# EAGLE board safebox_prototype (EAGLE 9.6.2)
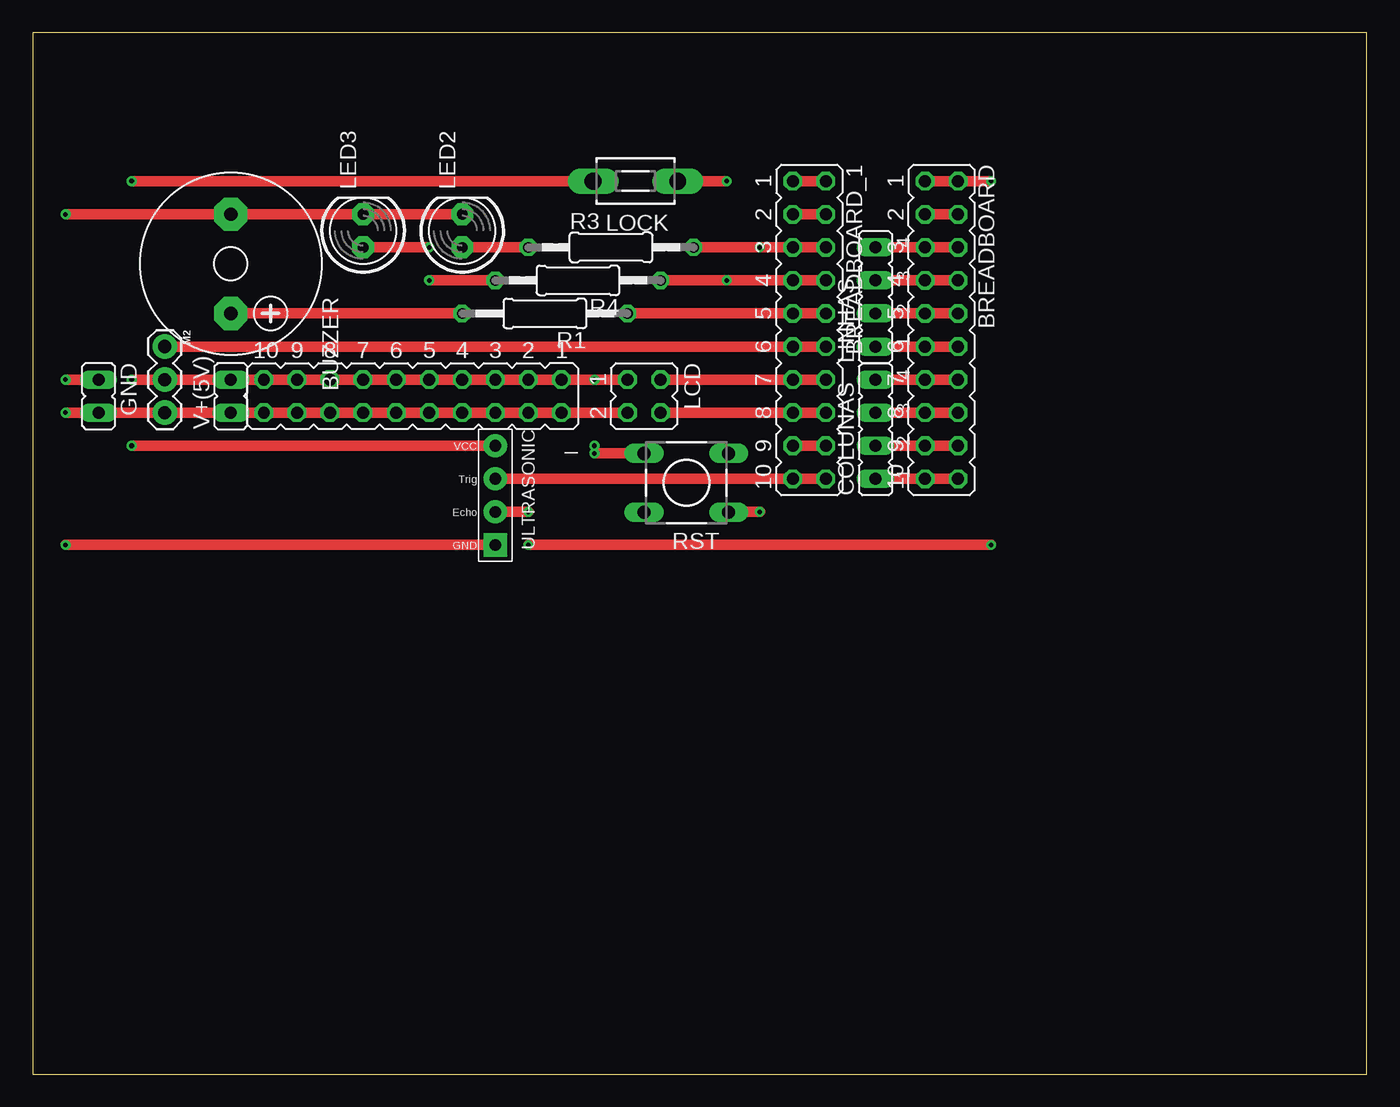
[diagram p0: board, top side]
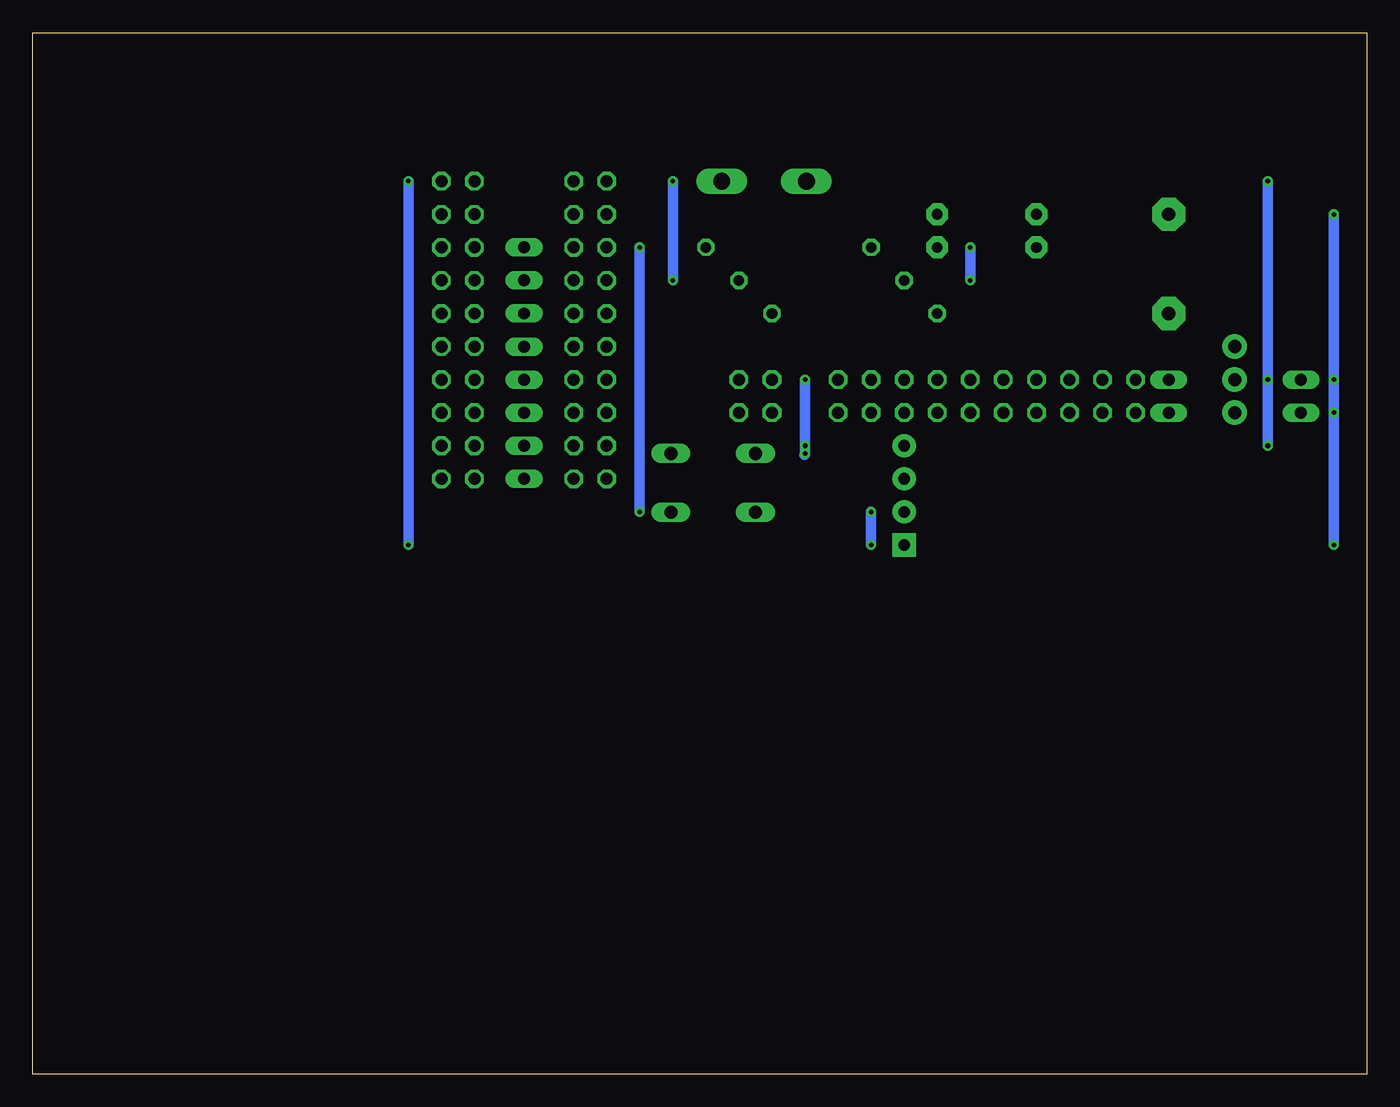
[diagram p1: board, bottom side, seen from below]

Size 102.54 x 80 mm. Coordinates in mm from the lower left corner, seen from the top.
Outline: 0,0 102.54,0 102.54,80 0,80 0,0
Copper layers (1*16): Top 0.035mm / dielectric 1.5mm / Bottom 0.035mm
Design rules "default": minimum track width 6mil, minimum drill 0.35mm, track to track 6mil, track to pad 6mil, pad to pad 6mil, via to via 6mil, smd to smd 6mil, copper to edge 40mil, drill to drill 6mil, minimum pad ring 10mil, minimum via ring 8mil, stop-mask expansion 4mil, vias tented up to drill 0mil, thermal gap 10mil

## Footprints (pad centres in the part's own frame; a part is rotated, then mirrored left to right if it is on the bottom)
JP10Q = drill 0.914 octagon: 1 -11.43,-1.27; 2 -11.43,1.27; 3 -8.89,-1.27; 4 -8.89,1.27; 5 -6.35,-1.27; 6 -6.35,1.27; 7 -3.81,-1.27; 8 -3.81,1.27; 9 -1.27,-1.27; 10 -1.27,1.27; 11 1.27,-1.27; 12 1.27,1.27; 13 3.81,-1.27; 14 3.81,1.27; 15 6.35,-1.27; 16 6.35,1.27; 17 8.89,-1.27; 18 8.89,1.27; 19 11.43,-1.27; 20 11.43,1.27
F/CM12P = drill 1.016 pad 2.54 octagon: + 3.81,0; - -3.81,0
JP4 = drill 0.914 long: 1 -3.81,0; 2 -1.27,0; 3 1.27,0; 4 3.81,0
JP1 = drill 0.914 long: 1 0,-1.27; 2 0,1.27
JP2Q = drill 0.914 octagon: 1 -1.27,-1.27; 2 -1.27,1.27; 3 1.27,-1.27; 4 1.27,1.27
LED5MM = drill 0.813 pad 1.676 octagon: A -1.27,0; K 1.27,0
DTS-3 = drill 1.3 long: 1 -3.25,0; 2 3.25,0
1X03 = drill 1.016 pad 1.88: 1 0,0; 2 2.54,0; 3 5.08,0
0207/12 = drill 0.813 octagon: 1 -6.35,0; 2 6.35,0
DTS-6 = drill 1 long: 1 -3.25,2.25; 2 3.25,2.25; 3 -3.25,-2.25; 4 3.25,-2.25
HC-SR04_FOOTPRINT = drill 0.9 pad 1.778: ECHO 0,1.27; TRIG 0,-1.27; VCC 0,-3.81 | drill 0.9 pad 1.778 square: GND 0,3.81

## Placement (x,y rotation side)
_  [JP10Q]  29.21,52.07 180 top
BREADBOARD  [JP10Q]  69.85,57.15 270 top
BREADBOARD_1  [JP10Q]  59.69,57.15 270 top
BUZZER  F/CM12P  [F/CM12P]  15.24,62.23 270 top
COLUNAS  [JP4]  64.77,49.53 90 top
GND  [JP1]  5.08,52.07 180 top
LCD  [JP2Q]  46.99,52.07 270 top
LED2  0.7  [LED5MM]  33.02,64.77 90 top
LED3  0.7  [LED5MM]  25.4,64.77 90 top
LINHAS  [JP4]  64.77,59.69 90 top
LOCK  DTS-3  [DTS-3]  46.33,68.58 180 top
M2  SERVO  [1X03]  10.16,55.88 270 top
R1  220  [0207/12]  39.37,58.42 180 top
R3  220  [0207/12]  44.45,63.5 0 top
R4  220  [0207/12]  41.91,60.96 180 top
RST  DTS-6  [DTS-6]  50.24,45.42 180 top
ULTRASONIC  HC-SR04  [HC-SR04_FOOTPRINT]  35.56,44.45 180 top
V+(5V)  [JP1]  15.24,52.07 0 top

## Library data of the parts
_ BREADBOARD BREADBOARD_1 COLUNAS GND LCD LINHAS V+(5V) = jumper
BUZZER = buzzer; OC_FARNELL: unknown; OC_NEWARK: unknown
LED2 LED3 = adafruit
LOCK RST = switch-tact
M2 = SparkFun-Electromechanical
R1 R3 R4 = rcl; SPICEPREFIX: R
ULTRASONIC = Ultrasonic Sensor HC-SR04

## Nets
AGND: _.2 _.4 _.6 _.8 _.10 _.12 _.14 _.16 _.18 _.20 BUZZER.- GND.1 GND.2 LCD.3 LED2.K LED3.K M2.3 ULTRASONIC.GND V+(5V).1
N$1: BREADBOARD_1.5 BREADBOARD_1.6 R3.2 RST.1
N$2: BREADBOARD_1.1 BREADBOARD_1.2
N$3: BREADBOARD.19 BREADBOARD.20 COLUNAS.1
N$4: BREADBOARD.17 BREADBOARD.18 COLUNAS.2
N$5: BREADBOARD.15 BREADBOARD.16 COLUNAS.3
N$6: BREADBOARD.13 BREADBOARD.14 COLUNAS.4
N$7: BREADBOARD.11 BREADBOARD.12 LINHAS.1
N$8: BREADBOARD.9 BREADBOARD.10 LINHAS.2
N$9: BREADBOARD.7 BREADBOARD.8 LINHAS.3
N$10: BREADBOARD.5 BREADBOARD.6 LINHAS.4
N$11: LED2.A R3.1
N$12: BUZZER.+ R1.2
N$13: BREADBOARD.1 BREADBOARD.2 ULTRASONIC.ECHO
N$14: BREADBOARD_1.15 BREADBOARD_1.16 LCD.4
N$15: BREADBOARD_1.13 BREADBOARD_1.14 LCD.2
N$16: BREADBOARD_1.17 BREADBOARD_1.18
N$17: BREADBOARD_1.9 BREADBOARD_1.10 R1.1
N$18: BREADBOARD_1.7 BREADBOARD_1.8 LOCK.1 R4.1
N$19: BREADBOARD_1.11 BREADBOARD_1.12 M2.1
N$20: BREADBOARD.3 BREADBOARD.4
N$21: BREADBOARD_1.19 BREADBOARD_1.20 ULTRASONIC.TRIG
N$23: BREADBOARD_1.3 BREADBOARD_1.4
N$24: LED3.A R4.2
N$26: _.1 _.3 _.5 _.7 _.9 _.11 _.13 _.15 _.17 _.19 LCD.1 LOCK.2 M2.2 RST.4 ULTRASONIC.VCC V+(5V).2

## Tracks (layer width: path | path; a pad name or v marks a point on that pad's centre or on a via)
AGND  (via drill 0.35)
  Top 0.813: LED2.K LED3.K BUZZER.- v2.54,66.04 | _.20 M2.3 GND.2 v2.54,50.8 | _.20 _.18 _.16 _.14 _.12 _.10 _.8 _.6 _.4 _.2 LCD.3 | V+(5V).1 _.20 | v2.54,40.64 ULTRASONIC.GND | v2.54,53.34 GND.1
  Bottom 0.813: v2.54,66.04 v2.54,53.34 v2.54,50.8 v2.54,40.64
N$1  (via drill 0.35)
  Top 0.813: BREADBOARD_1.6 BREADBOARD_1.5 v55.88,63.5 R3.2 | v55.88,43.18 53.51,43.18 RST.1
  Bottom 0.813: v55.88,63.5 v55.88,43.18
N$2
  Top 0.813: BREADBOARD_1.1 BREADBOARD_1.2
N$3
  Top 0.813: COLUNAS.1 BREADBOARD.20 BREADBOARD.19
N$4
  Top 0.813: COLUNAS.2 BREADBOARD.18 BREADBOARD.17
N$5
  Top 0.813: COLUNAS.3 BREADBOARD.16 BREADBOARD.15
N$6
  Top 0.813: COLUNAS.4 BREADBOARD.14 BREADBOARD.13
N$7
  Top 0.813: LINHAS.1 BREADBOARD.12 BREADBOARD.11
N$8
  Top 0.813: LINHAS.2 BREADBOARD.10 BREADBOARD.9
N$9
  Top 0.813: LINHAS.3 BREADBOARD.8 BREADBOARD.7
N$10
  Top 0.813: BREADBOARD.6 BREADBOARD.5 LINHAS.4
N$11
  Top 0.813: LED2.A R3.1
N$12
  Top 0.813: BUZZER.+ R1.2
N$13  (via drill 0.35)
  Top 0.813: BREADBOARD.1 BREADBOARD.2 v73.66,68.58 | ULTRASONIC.ECHO v38.1,43.18 | v38.1,40.64 v73.66,40.64
  Bottom 0.813: v38.1,43.18 v38.1,40.64 | v73.66,68.58 v73.66,40.64
N$14
  Top 0.813: LCD.4 BREADBOARD_1.16 BREADBOARD_1.15
N$15
  Top 0.813: LCD.2 BREADBOARD_1.14 BREADBOARD_1.13
N$16
  Top 0.813: BREADBOARD_1.18 BREADBOARD_1.17
N$17
  Top 0.813: BREADBOARD_1.10 BREADBOARD_1.9 R1.1
N$18  (via drill 0.35)
  Top 0.813: R4.1 v53.34,60.96 BREADBOARD_1.8 BREADBOARD_1.7 | LOCK.1 v53.34,68.58
  Bottom 0.813: v53.34,68.58 v53.34,60.96
N$19
  Top 0.813: BREADBOARD_1.12 BREADBOARD_1.11 M2.1
N$20
  Top 0.813: BREADBOARD.3 BREADBOARD.4
N$21
  Top 0.813: BREADBOARD_1.20 BREADBOARD_1.19 ULTRASONIC.TRIG
N$23
  Top 0.813: BREADBOARD_1.4 BREADBOARD_1.3
N$24  (via drill 0.35)
  Top 0.813: LED3.A v30.48,63.5 | R4.2 v30.48,60.96
  Bottom 0.813: v30.48,63.5 v30.48,60.96
N$26  (via drill 0.35)
  Top 0.813: _.19 M2.2 v7.62,53.34 | _.19 _.17 _.15 _.13 _.11 _.9 _.7 _.5 _.3 _.1 v43.18,53.34 LCD.1 | RST.4 43.22,47.66 43.2,47.68 v43.18,47.68 | v7.62,68.58 LOCK.2 | ULTRASONIC.VCC v7.62,48.26 | V+(5V).2 _.19
  Bottom 0.813: v43.18,53.34 v43.18,48.26 v43.18,47.68 43.18,47.6 43.2,47.57 | v7.62,68.58 v7.62,53.34 v7.62,48.26